# EAGLE board Laser_Array_CPU_V1.1 (EAGLE 7.7.0)
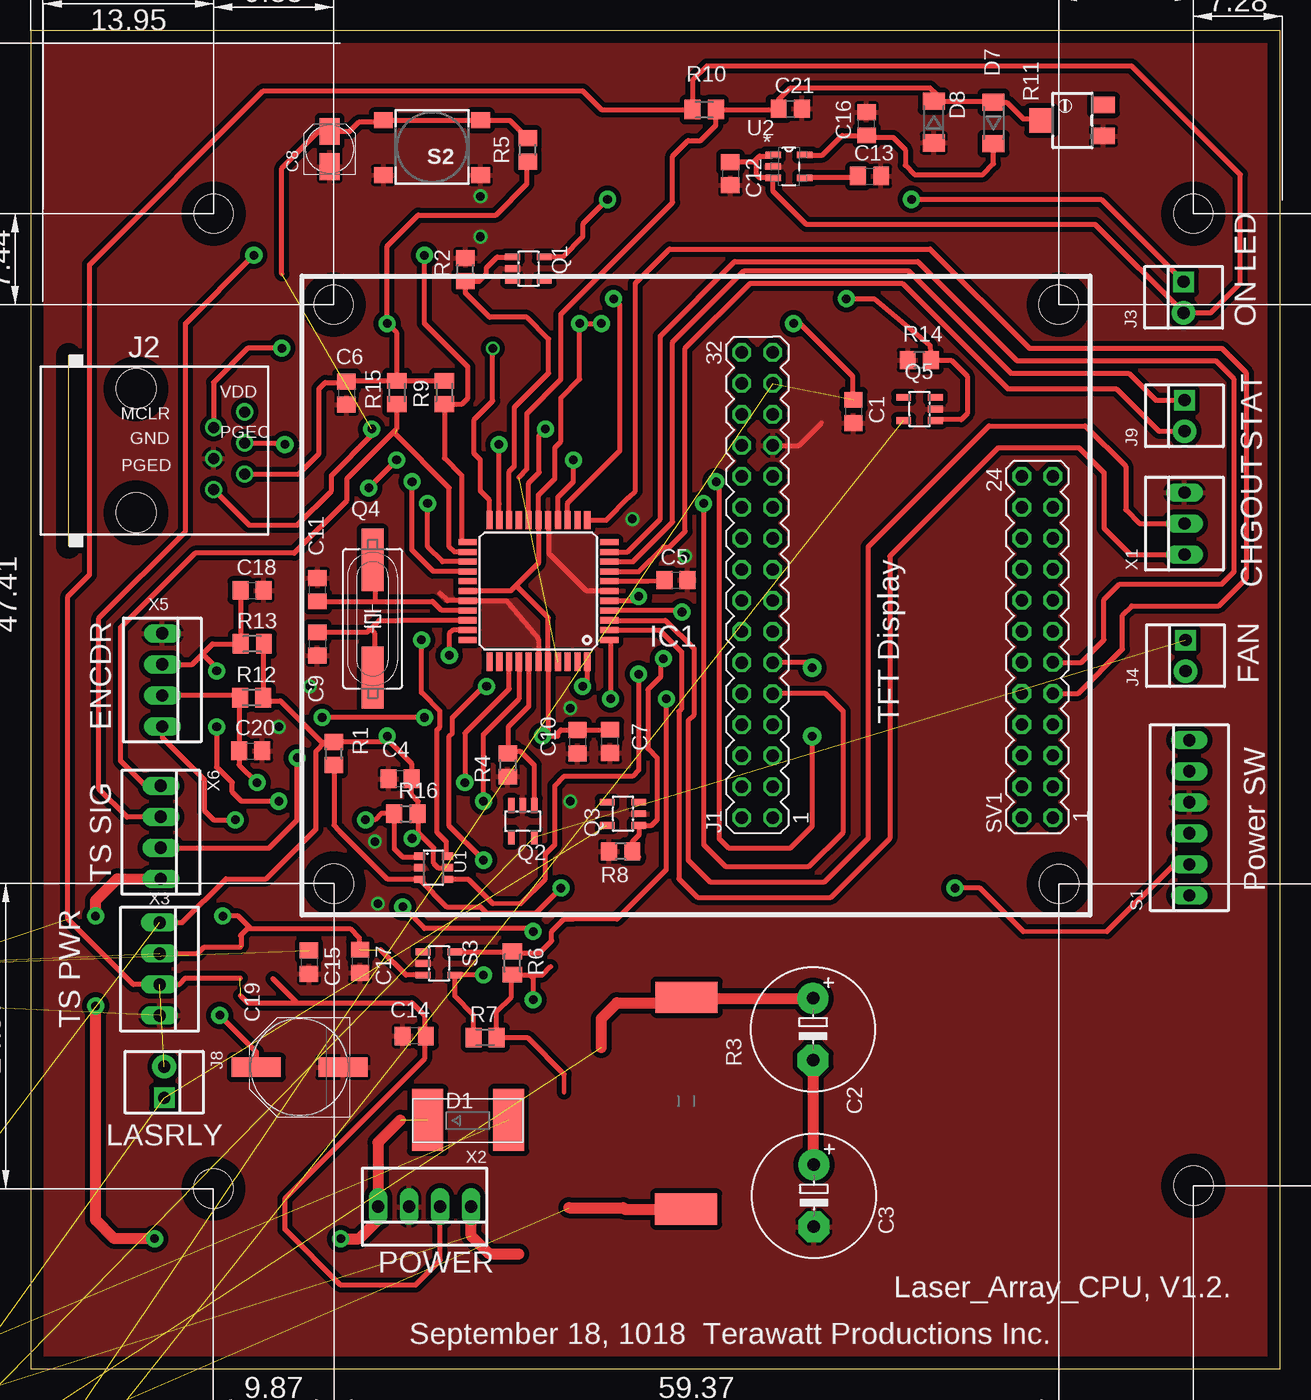
[diagram p0: board, top side]
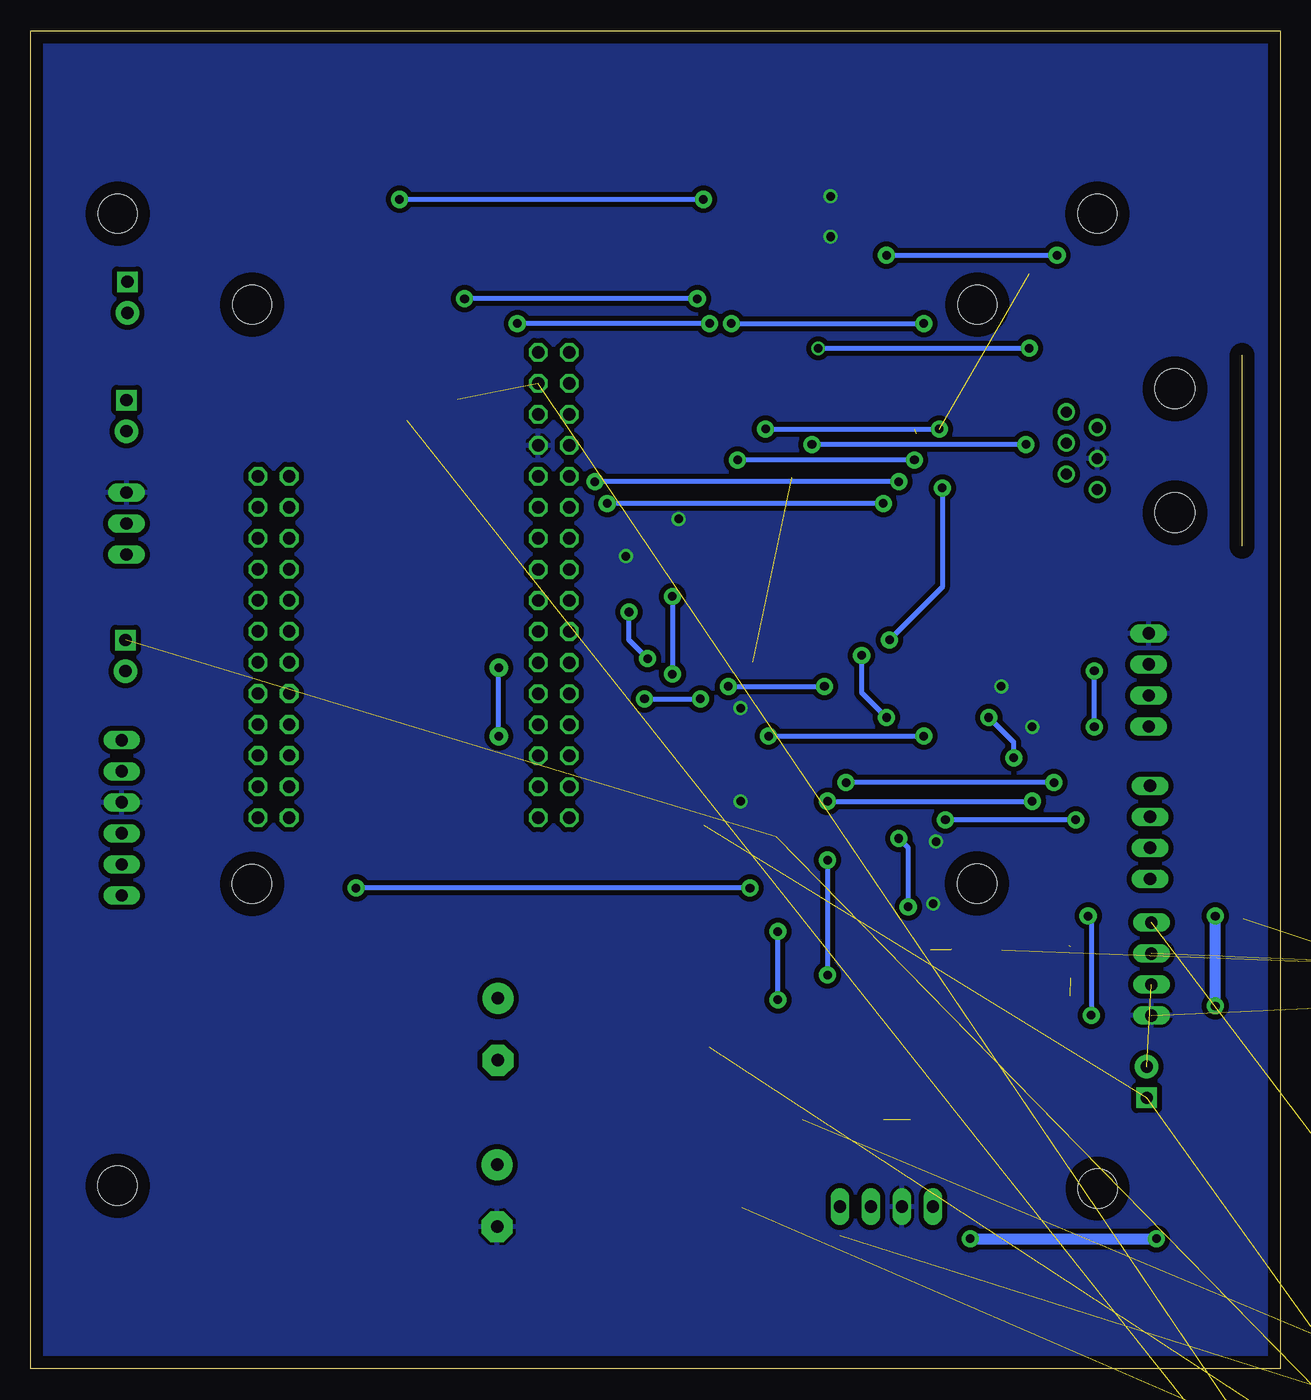
[diagram p1: board, bottom side, seen from below]

Size 102.34 x 109.59 mm. Coordinates in mm from the lower left corner, seen from the top.
Outline: 0,0 102.34,0 102.34,109.59 0,109.59 0,0
Copper layers (1*16): Top 0.035mm / dielectric 1.5mm / Bottom 0.035mm
Design rules "default *": minimum track width 10mil, minimum drill 24mil, track to track 16mil, track to pad 14mil, pad to pad 14mil, via to via 14mil, smd to smd 14mil, copper to edge 40mil, drill to drill 8mil, minimum pad ring 10mil, minimum via ring 8mil, stop-mask expansion 4mil, vias tented up to drill 0mil, thermal gap 10mil
Net classes: 0 default: width 0.254 mm, drill 0.508 mm, clearance 0.203 mm
Holes 3.2 mm at 24.82,87.15 84.19,87.15 24.84,39.74 84.21,39.72 14.97,14.77 95.22,15.01 14.99,94.59 95.21,94.6

## Footprints (pad centres in the part's own frame; a part is rotated, then mirrored left to right if it is on the bottom)
C0805 = smd 1.3 x 1.5: 1 -0.95,0; 2 0.95,0
E5-10,5 = drill 1.016 pad 2.54: + -2.54,0 | drill 1.016 pad 2.54 octagon: - 2.54,0
CAP3X3 = smd 2.2 x 1.6: + 1.45,0; - -1.425,0
PANASONIC_F = smd 4 x 1.6: + 3.55,0; - -3.55,0
S10M-TPMSCT-ND = smd 2.54 x 5.08: A 4.106,0.05; C -2.54,0.055
DO214AC = smd 1.8 x 1.7: A 2.05,0; C -2.05,0
SOD80 = smd 1.4 x 1.8: 1 -1.7,0; 2 1.7,0
TQFP44 = smd 1.5 x 0.5: 1 -5.8,4; 2 -5.8,3.2; 3 -5.8,2.4; 4 -5.8,1.6; 5 -5.8,0.8; 6 -5.8,0; 7 -5.8,-0.8; 8 -5.8,-1.6; 9 -5.8,-2.4; 10 -5.8,-3.2; 11 -5.8,-4; 23 5.8,-4; 24 5.8,-3.2; 25 5.8,-2.4; 26 5.8,-1.6; 27 5.8,-0.8; 28 5.8,0; 29 5.8,0.8; 30 5.8,1.6; 31 5.8,2.4; 32 5.8,3.2; 33 5.8,4 | smd 0.5 x 1.5: 12 -4,-5.8; 13 -3.2,-5.8; 14 -2.4,-5.8; 15 -1.6,-5.8; 16 -0.8,-5.8; 17 0,-5.8; 18 0.8,-5.8; 19 1.6,-5.8; 20 2.4,-5.8; 21 3.2,-5.8; 22 4,-5.8; 34 4,5.8; 35 3.2,5.8; 36 2.4,5.8; 37 1.6,5.8; 38 0.8,5.8; 39 0,5.8; 40 -0.8,5.8; 41 -1.6,5.8; 42 -2.4,5.8; 43 -3.2,5.8; 44 -4,5.8
MA16-2 = drill 1.016 octagon: 1 -20.32,-1.27; 2 -20.32,1.27; 3 -17.78,-1.27; 4 -17.78,1.27; 5 -15.24,-1.27; 6 -15.24,1.27; 7 -12.7,-1.27; 8 -12.7,1.27; 9 -10.16,-1.27; 10 -10.16,1.27; 11 -7.62,-1.27; 12 -7.62,1.27; 13 -5.08,-1.27; 14 -5.08,1.27; 15 -2.54,-1.27; 16 -2.54,1.27; 17 0,-1.27; 18 0,1.27; 19 2.54,-1.27; 20 2.54,1.27; 21 5.08,-1.27; 22 5.08,1.27; 23 7.62,-1.27; 24 7.62,1.27; 25 10.16,-1.27; 26 10.16,1.27; 27 12.7,-1.27; 28 12.7,1.27; 29 15.24,-1.27; 30 15.24,1.27; 31 17.78,-1.27; 32 17.78,1.27
RJ11-NO_SHIELD = drill 0.9 pad 1.4: 1 -3.175,8.89; 2 -1.905,6.35; 3 -0.635,8.89; 4 0.635,6.35; 5 1.905,8.89; 6 3.175,6.35 | hole 3.251: -5.08,0; 5.08,0
22-23-2021 = drill 1 pad 1.93: 1 -1.27,0 | drill 1 pad 1.676 square: 2 1.27,0
SOT23-5L = smd 0.55 x 1.2: 1 -0.95,-1.3; 2 0,-1.3; 3 0.95,-1.3; 4 0.95,1.3; 5 -0.95,1.3
SM49 = smd 5.08 x 1.778: 1 -4.826,0; 2 4.826,0
R0805 = smd 1.3 x 1.5: 1 -0.95,0; 2 0.95,0
RESISTOR5W = smd 2.54 x 5.08: 1 -4,-0.95; 2 13.34,-1
M0805 = smd 1.3 x 1.6: 1 -0.95,0; 2 0.95,0
RTRIM3224X = smd 1.32 x 1.9: 1 -1.27,-2.54; 3 1.27,-2.54 | smd 2 x 2: 2 0,2.54
RELAY_SPST_1A = smd 1 x 2.2: 1 1.88,-5.825; 2 6.96,-5.825; 3 6.96,2.175; 4 -0.66,2.175
22-23-2061 = drill 1 long: 1 -6.35,0; 2 -3.81,0; 3 -1.27,0; 4 1.27,0; 5 3.81,0; 6 6.35,0
PUSHBUTTON_SMD_SJ = smd 1.55 x 1.3: 1 -3.865,2.205; 2 4.085,2.205; 3 -3.865,-2.295; 4 4.085,-2.295
MA12-2 = drill 1.016 octagon: 1 -13.97,-1.27; 2 -13.97,1.27; 3 -11.43,-1.27; 4 -11.43,1.27; 5 -8.89,-1.27; 6 -8.89,1.27; 7 -6.35,-1.27; 8 -6.35,1.27; 9 -3.81,-1.27; 10 -3.81,1.27; 11 -1.27,-1.27; 12 -1.27,1.27; 13 1.27,-1.27; 14 1.27,1.27; 15 3.81,-1.27; 16 3.81,1.27; 17 6.35,-1.27; 18 6.35,1.27; 19 8.89,-1.27; 20 8.89,1.27; 21 11.43,-1.27; 22 11.43,1.27; 23 13.97,-1.27; 24 13.97,1.27
SOT23-6 = smd 0.6 x 0.9: 1 -0.95,-1.15; 2 0,-1.15; 3 0.95,-1.15; 4 0.95,1.15; 5 0,1.15; 6 -0.95,1.15
SOT95P280X145-5N = smd 1.27 x 0.559: 1 -1.295,0.94; 2 -1.295,0; 3 -1.295,-0.94; 4 1.295,-0.94; 5 1.295,0.94
22-23-2031 = drill 1 long: 1 -2.54,0; 2 0,0; 3 2.54,0
22-23-2041 = drill 1 long: 1 -3.81,0; 2 -1.27,0; 3 1.27,0; 4 3.81,0

## Placement (x,y rotation side)
C1  0.1uF  [C0805]  67.37,78.4 270 top
C2  10F  [E5-10,5]  64.08,27.82 270 top
C3  10F  [E5-10,5]  64.13,14.19 270 top
C4  0.1uF  [C0805]  30.26,48.32 180 top
C5  10uF  [C0805]  52.86,64.59 0 top
C6  0.1uF  [C0805]  25.87,79.9 270 top
C7  0.1uF  [C0805]  47.45,51.38 90 top
C8  10uF  [CAP3X3]  24.49,99.88 90 top
C9  18pF  [C0805]  23.48,59.37 270 top
C10  0.1uF  [C0805]  44.79,51.36 270 top
C11  18pF  [C0805]  23.5,63.8 90 top
C12  1uF  [C0805]  57.3,97.86 270 top
C13  10nF  [C0805]  68.7,97.67 0 top
C14  1uF  [C0805]  31.42,27.26 180 top
C15  10nF  [C0805]  22.8,33.31 270 top
C16  2.2uF  [C0805]  68.46,101.95 90 top
C17  2.2uF  [C0805]  26.99,33.38 270 top
C18  10nF  [C0805]  18.14,63.75 0 top
C19  470uF  [PANASONIC_F]  22.03,24.7 180 top
C20  10nF  [C0805]  18.03,50.61 0 top
C21  10nF  [C0805]  62.21,103.19 0 top
D1  S10M-TPMSCT_ND  [S10M-TPMSCT-ND]  35.05,20.34 0 top
D2  S10M-TPMSCT_ND  [S10M-TPMSCT-ND]  -20.07,-5.59 0 top  (outside the outline)
D3  S10M-TPMSCT_ND  [S10M-TPMSCT-ND]  -29.46,-5.59 0 top  (outside the outline)
D4  [DO214AC]  -28.19,-17.27 0 top  (outside the outline)
D5  [DO214AC]  -28.19,-21.33 0 top  (outside the outline)
D6  [DO214AC]  -28.19,-25.4 0 top  (outside the outline)
D7  LL4148FSCT-ND  [SOD80]  78.85,102.02 90 top
D8  LL4148FSCT-ND  [SOD80]  73.97,102.09 270 top
D9  [DO214AC]  -28.19,-29.46 0 top  (outside the outline)
D10  [DO214AC]  -28.19,-49.27 0 top  (outside the outline)
IC1  PIC24FJ64GA004  [TQFP44]  41.58,63.7 180 top
J1  MA16-2  [MA16-2]  59.51,65.46 90 top
J2  [RJ11-NO_SHIELD]  8.64,75.19 270 top
J3  22-23-2021  [22-23-2021]  94.41,87.75 90 top
J4  22-23-2021  [22-23-2021]  94.57,58.41 90 top
J8  22-23-2021  [22-23-2021]  10.95,23.48 270 top
J9  22-23-2021  [22-23-2021]  94.48,78.05 90 top
Q1  [SOT23-5L]  40.77,90.1 270 top
Q2  [SOT23-5L]  40.31,44.84 180 top
Q3  [SOT23-5L]  48.51,45.45 90 top
Q4  [SM49]  28.02,61.43 90 top
Q5  [SOT23-5L]  72.79,78.6 90 top
R1  10k  [R0805]  24.84,50.39 90 top
R2  100k  [R0805]  35.6,90 90 top
R3  10R, 5W  [RESISTOR5W]  54.68,26.43 270 top
R4  100k  [R0805]  39.07,49.44 270 top
R5  10k  [R0805]  40.71,99.81 90 top
R6  4.7k  [M0805]  39.46,33.23 270 top
R7  4.7k  [M0805]  37.22,27.14 0 top
R8  100k  [R0805]  48.32,42.38 180 top
R9  4.7k  [M0805]  33.88,79.96 90 top
R10  220k  [M0805]  55.16,103.12 180 top
R11  200k  [RTRIM3224X]  85.31,102.23 90 top
R12  10k  [M0805]  18.1,54.96 0 top
R13  10k  [M0805]  18.16,59.36 0 top
R14  100k  [R0805]  72.77,82.6 180 top
R15  4.7k  [M0805]  30,79.96 90 top
R16  10k  [R0805]  30.73,45.47 0 top
RLY1  RELAY_SPST_1A  [RELAY_SPST_1A]  -24.38,-36.57 0 top  (outside the outline)
S1  [22-23-2061]  94.88,45.13 90 top
S2  TACT_PB  [PUSHBUTTON_SMD_SJ]  32.97,99.95 180 top
S3  TC74  [SOT23-5L]  33.45,33.2 270 top
SV1  [MA12-2]  82.44,59.12 90 top
U1  MAX6817  [SOT23-6]  32.99,41.03 270 top
U2  LP2985-28DBVTE4  [SOT95P280X145-5N]  62.09,98.46 0 top
U4  LP2985-50DBVR  [SOT95P280X145-5N]  -17.78,31.5 90 top  (outside the outline)
X1  22-23-2031  [22-23-2031]  94.48,69.22 90 top
X2  22-23-2041  [22-23-2041]  32.27,13.29 180 top
X3  22-23-2041  [22-23-2041]  10.57,32.74 270 top
X5  22-23-2041  [22-23-2041]  10.78,56.42 270 top
X6  22-23-2041  [22-23-2041]  10.67,43.94 270 top

## Library data of the parts
C1-C7 C9-C21 R1 R2 R4-R16 = rcl
C8 D1-D6 D9 D10 J1 J2 Q1-Q3 Q5 R3 RLY1 S1-S3 U1 = Mine
D7 D8 = semicon-smd-ipc
IC1 = microchip; MPN: PIC24FJ64GA004-E/PT; OC_FARNELL: 1332299; OC_NEWARK: 98M1927
J3 J4 J8 J9 = Mine; MF: MOLEX; MPN: 22-23-2021; OC_FARNELL: 1462926; OC_NEWARK: 25C3832
Q4 = adafruit; OC_FARNELL: unknown; OC_NEWARK: unknown
SV1 = con-lstb; OC_FARNELL: unknown; OC_NEWARK: unknown
U2 = Texas Instruments_By_element14_Batch_1; MPN: LP2985-28DBVTE4; OC_FARNELL: 1053676; OC_NEWARK: 97K3681; PACKAGE: SOT-23-5; SUPPLIER: Texas Instruments
U4 = Texas Instruments_By_element14_Batch_1; MPN: LP2985-33DBVT; OC_FARNELL: -; OC_NEWARK: 43J9347; PACKAGE: SOT-23-5; SUPPLIER: Texas Instruments
X1 = Mine; MF: MOLEX; MPN: 22-23-2031; OC_FARNELL: 1462950; OC_NEWARK: 30C0862
X2 X3 X5 X6 = Mine; MF: MOLEX; MPN: 22-23-2041; OC_FARNELL: 1462920; OC_NEWARK: 38C0355

## Nets
!RESET: IC1.32 X6.3
+12V: C12.1 C14.1 D6.C D9.C J3.1 J8.1 R10.2 U2.1 U2.3 U4.1 U4.3 X2.2 X3.3
CHGA: IC1.8 J9.1
CHGB: IC1.9 J9.2
CHGOUTA: IC1.2 X1.1
CHGOUTB: IC1.3 X1.2
CS: IC1.12 SV1.9
DC: IC1.10 SV1.11
DISPWR: IC1.14 Q5.1 R14.1
ENCDR_A: C20.1 IC1.36 R12.1 X5.3
ENCDR_B: C18.1 IC1.37 R13.1 X5.2
ENSW_I: R16.1 U1.1 X5.4
ENSW_O: IC1.15 U1.6
EXFAN: IC1.38 Q2.1 R4.1
GND: C1.2 C3.- C4.2 C5.2 C6.2 C7.1 C8.- C9.2 C10.2 C11.2 C12.2 C13.2 C14.2 C15.2 C16.2 C17.2 C18.2 C19.- C20.2 C21.2 D8.2 IC1.6 IC1.16 IC1.29 IC1.39 J1.25 J2.4 Q1.2 Q2.2 Q3.2 Q5.2 R2.2 R4.2 R8.2 R11.1 R14.2 S1.4 S2.1 S2.2 S3.2 U1.2 U2.2 U4.2 X1.3 X2.3 X3.4 X5.1
LASRLY: IC1.4 Q3.1 R8.1
MOSI: IC1.25 J1.9
N$1: C8.+ IC1.18 J2.6 R5.2 S2.3 S2.4
N$2: C5.1 IC1.7
N$3: D1.A D2.C
N$4: IC1.22 J2.2
N$6: C9.1 IC1.31 Q4.1
N$7: C11.1 IC1.30 Q4.2
N$8: D10.A Q5.5 RLY1.3
N$9: R1.1 S1.2 U1.3
N$10: IC1.5 U1.4
N$11: J3.2 Q1.5
N$12: D6.A J4.2 Q2.5
N$13: D9.A J8.2 Q3.5
N$14: C1.1 J1.29 RLY1.1
N$15: C15.1 U4.4
N$16: IC1.21 J2.3
N$33: D3.C D4.A R3.2
N$36: C2.- C3.+
N$37: C2.+ D5.A R3.1
N$55: C13.1 U2.4
ONLED: IC1.20 Q1.1 R2.1
SCL1: IC1.44 R7.1 S3.4
SCL2: IC1.24 R15.1 X6.1
SCLK: IC1.26 J1.11
SDA1: IC1.1 R6.1 S3.5
SDA2: IC1.23 R9.1 X6.2
VDD: C4.1 C6.1 C7.2 C10.1 D4.C D5.C D10.C IC1.17 IC1.28 IC1.40 J2.5 R1.2 R5.1 R6.2 R7.2 R9.2 R12.2 R13.2 R15.2 R16.2 RLY1.2 RLY1.4 U1.5 X3.1
VDD_TB: D2.A D3.A X2.1
VIN1: C21.1 D7.2 D8.1 IC1.41 R10.1 R11.2
VLASER: D1.C X2.4 X6.4
VRR: C16.1 D7.1 U2.5
VTS: C17.1 C19.+ S3.3 U4.5 X3.2

## Tracks (layer width: path | path; a pad name or v marks a point on that pad's centre or on a via)
!RESET  (via drill 0.7 pad 1.4)
  Top 0.406: v21.84,50.04 21.84,44.96 19.53,42.65 19.53,42.67 X6.3 | IC1.32 34.59,60.5 34.29,60.2 v34.29,58.42 | v32.26,53.34 v23.88,53.34
  Bottom 0.406: v23.88,53.34 21.84,51.31 v21.84,50.04 | v34.29,58.42 34.29,55.37 v32.26,53.34
+12V  (6 unrouted)
  Top 0.406: 59.44,99.06 59.44,97.79 59.69,97.54 60.78,97.54 U2.3 60.8,96.43 63.5,93.73 87.16,93.73 J3.1 96.63,86.48 99.06,88.9 99.06,97.79 90.17,106.68 55.37,106.68 54.21,105.52 R10.2 46.74,103.12 45.21,104.65 19.05,104.65 4.83,90.43 4.83,65.03 3.05,63.25 3.05,36.83 8.41,31.47 X3.3 10.59,31.5 12.19,31.5 12.7,32.01 17.17,32.01 | 59.44,99.06 59.69,99.32 60.72,99.32 U2.1 | 59.44,99.06 59.19,98.81 C12.1 | 19.84,31.98 21.84,29.97 | 21.84,29.97 31.24,29.97 32.26,28.96 32.26,27.37 C14.1 32.26,27.14 32.26,25.4 20.83,13.97 20.83,11.43 25.4,6.86 31.5,6.86 33.54,8.9 X2.2 | 17.19,30.56 17.78,29.97 21.84,29.97
CHGA
  Top 0.406: IC1.8 47.4,65.28 49.78,65.28 51.82,67.31 52.32,67.31 53.59,68.58 53.59,83.57 58.93,88.9 71.37,88.9 80.01,80.27 88.9,80.27 92.38,76.78 J9.1
CHGB
  Top 0.406: IC1.9 49.33,66.1 52.58,69.34 52.58,84.08 58.42,89.92 71.88,89.92 80.26,81.54 89.92,81.54 92.13,79.32 J9.2
CHGOUTA
  Top 0.406: IC1.2 51.52,60.5 53.34,58.68 53.34,54.1 53.09,53.85 53.09,40.13 54.61,38.61 65.53,38.61 70.36,43.44 70.36,66.55 79.25,75.44 85.85,75.44 87.88,73.41 87.88,68.84 90.04,66.68 X1.1
CHGOUTB
  Top 0.406: IC1.3 51.99,61.3 54.36,58.93 54.36,53.6 53.85,53.09 53.85,41.66 55.63,39.88 65.02,39.88 68.58,43.44 68.58,67.31 78.49,77.22 86.36,77.22 89.66,73.92 89.66,70.36 90.8,69.22 X1.2
CS
  Top 0.406: IC1.12 47.15,69.5 49.02,71.38 49.53,71.88 49.53,88.9 52.32,91.7 73.66,91.7 81.79,83.57 97.54,83.57 99.57,81.54 99.57,64.77 97.28,62.49 90.17,62.49 89.41,61.72 89.41,58.93 85.79,55.31 SV1.9
DC
  Top 0.406: IC1.10 48.86,66.9 51.56,69.6 51.56,84.58 57.66,90.68 72.64,90.68 80.77,82.55 97.03,82.55 98.55,81.03 98.55,65.28 97.54,64.26 89.15,64.26 87.88,62.99 87.88,59.69 86.04,57.85 SV1.11
DISPWR  (via drill 0.7 pad 1.4)
  Top 0.406: Q5.1 74.17,77.73 76.2,77.73 76.71,78.23 76.71,81.28 75.39,82.6 R14.1 73.66,83.82 69.09,87.63 v66.8,87.63 | 43.94,69.54 IC1.14 43.98,70.91 48.26,75.19 48.26,87.12 v47.75,87.63
  Bottom 0.406: v47.75,87.63 v66.8,87.63
ENCDR_A  (via drill 0.7 pad 1.4)
  Top 0.406: X5.3 16.96,55.15 R12.1 17.08,54.89 C20.1 17.08,49.47 v18.54,48.01 | IC1.36 39.18,55.69 35.56,52.07 v35.56,48.01
  Bottom 0.406: v18.54,48.01 v35.56,48.01
ENCDR_B  (via drill 0.7 pad 1.4)
  Top 0.406: X5.2 13.24,57.69 14.1,58.55 | 14.1,58.55 14.91,59.36 R13.1 17.21,63.74 C18.1 | IC1.37 39.98,54.87 37.08,51.97 v37.08,46.48 | v20.32,46.48 17.27,46.48 16.51,47.25 16.51,48.01 15.24,49.28 v15.24,52.58 | v15.24,57.15 15.24,57.41 14.1,58.55
  Bottom 0.406: v37.08,46.48 v20.32,46.48 | v15.24,52.58 v15.24,57.15
ENSW_I  (via drill 0.7 pad 1.4)
  Top 0.406: U1.1 31.77,41.91 30.48,41.91 29.78,42.61 R16.1 28.7,45.47 28.19,44.96 v27.43,44.96 | X5.4 10.78,51.7 14.22,48.26 14.22,45.72 14.99,44.96 v16.76,44.96
  Bottom 0.406: v16.76,44.96 v27.43,44.96
ENSW_O  (via drill 0.7 pad 1.4)
  Top 0.406: v32,59.69 32,55.37 33.53,53.85 33.53,52.58 33.27,52.33 33.27,43.94 34.04,43.18 34.04,42.09 U1.6 | IC1.15 43.18,71.38 44.45,72.65 v44.45,74.42 | v27.69,72.14 v29.97,74.42
  Bottom 0.406: v29.97,74.42 v44.45,74.42 | v27.69,72.14 27.69,64.01 v32,59.69
EXFAN
  Top 0.406: IC1.38 40.78,54.25 39.12,52.58 39.12,50.44 R4.1 39.23,50.55 40.13,50.55 41.26,49.42 Q2.1
GND  (via drill 0.7, 0.7 pad 1.14)  (1 unrouted)
  Top 0.406: 47.44,63.76 IC1.6 47.33,63.76 45.47,63.76 42.42,66.8 42.42,69.46 IC1.16 | IC1.39 41.58,59.77 38.96,62.9 IC1.29 34.13,62.9 33.53,63.5 | J1.25 62.92,75.62 64.75,77.45
  other vias: 28.19,43.18 28.45,38.1 44.2,46.48 44.2,54.1 20.32,52.58 22.86,55.88 36.83,96.01 36.83,92.71 49.28,69.6 53.59,66.55
  pour Top: 0,109.59 102.61,109.59 102.61,-0.24 0,-0.24
  pour Bottom: 0,109.59 103.08,109.59 103.33,-0.5 0.25,-0.5
LASRLY  (via drill 0.7 pad 1.4)
  Top 0.406: 49.81,41.9 R8.1 49.28,43.18 49.81,43.72 Q3.1 50.85,44.5 51.31,44.96 51.31,50.04 50.55,50.8 50.55,55.63 51.56,56.64 51.56,57.91 v51.82,58.17 | v53.34,61.98 53.22,62.1 IC1.4
  Bottom 0.406: v51.82,58.17 53.34,59.69 v53.34,61.98
MOSI  (via drill 0.7 pad 1.4)
  Top 0.406: IC1.25 33.72,66.1 32.51,67.31 v32.51,70.87 | v55.12,70.87 55.12,42.93 56.9,41.15 63.75,41.15 66.55,43.94 66.55,53.85 65.1,55.3 J1.9
  Bottom 0.406: v32.51,70.87 v55.12,70.87
N$1  (via drill 0.7 pad 1.4)  (1 unrouted)
  Top 0.406: R5.2 39.23,102.24 S2.3 S2.4 28.76,102.11 26.92,102.11 26.14,101.33 C8.+ 23.6,101.33 20.57,98.3 20.57,89.66 | IC1.18 40.78,72.53 41.66,73.41 41.66,76.46 v42.16,76.96 | J2.6 17.91,69.09 21.84,69.09 24.64,71.88 24.64,73.15 27.94,76.46 v27.94,76.96
  Bottom 0.406: v42.16,76.96 v27.94,76.96
N$2
  Top 0.406: IC1.7 50.55,64.5 C5.1
N$3  (1 unrouted)
N$4  (via drill 0.7, 0.7 pad 1.4)
  Top 0.406: IC1.22 37.58,71.13 36.83,71.88 36.83,74.42 36.32,74.93 36.32,77.73 37.85,79.25 v37.85,83.57 | v20.57,83.57 17.78,83.57 14.99,80.77 J2.2
  Bottom 0.406: v37.85,83.57 v20.57,83.57
N$6
  Top 0.406: IC1.31 30.48,61.3 | 30.48,61.3 30.23,61.3 | C9.1 27.55,60.32 27.81,60.58 | 27.81,60.58 28.53,61.3 30.48,61.3 | Q4.1 28.19,56.78 28.19,60.2 27.81,60.58
N$7
  Top 0.406: C11.1 28.19,62.85 | 28.19,62.85 32.91,62.85 33.66,62.1 IC1.30 | Q4.2 28.19,66.08 28.19,62.85
N$8  (2 unrouted)
N$9  (via drill 0.7 pad 1.4)
  Top 0.356: 81.28,35.82 88.14,35.82
  Top 0.406: 25.1,44.25 25.27,44.07 | 25.27,44.07 29.21,40.13 31.79,40.13 U1.3 34.08,37.85 36.83,37.85 37.34,37.34 41.4,37.34 v43.43,39.37 | R1.1 24.84,44.5 25.27,44.07 | 81.28,35.82 77.72,39.37 v75.69,39.37 | 88.14,35.82 93.64,41.32 S1.2
  Bottom 0.406: v43.43,39.37 v75.69,39.37
N$10  (via drill 0.7 pad 1.4)
  Top 0.356: 37.85,38.1 40.13,38.1
  Top 0.406: IC1.5 49.44,62.9 v49.78,63.25 | v49.78,56.9 49.78,49.02 49.28,48.52 43.69,48.52 42.93,47.75 42.93,42.93 42.16,42.17 42.16,40.13 40.13,38.1 | U1.4 35.86,40.08 37.85,38.1
  Bottom 0.406: v49.78,63.25 v49.78,56.9
N$11  (via drill 0.7 pad 1.4)
  Top 0.406: v72.14,95.76 87.67,95.76 J3.2 | v47.24,95.76 45.21,93.73 45.21,92.71 43.55,91.05 Q1.5
  Bottom 0.406: v72.14,95.76 v47.24,95.76
N$12  (2 unrouted)
N$13  (2 unrouted)
N$14  (2 unrouted)
N$15  (1 unrouted)
N$16  (via drill 0.7 pad 1.4, 0.71 pad 1.4)
  Top 0.406: IC1.21 38.38,70.84 v38.35,75.69 | J2.3 20.7,75.82 v20.83,75.69
  Bottom 0.406: v20.83,75.69 v38.35,75.69
N$33  (2 unrouted)
  Top 0.356: 48.51,13.21 48.63,13.09
  Top 0.889: 44.08,13.21 48.51,13.21 | 48.63,13.09 R3.2
N$36
  Top 0.356: 64.08,16.78 C3.+
  Top 0.889: C2.- 64.08,16.78
N$37  (1 unrouted)
  Top 0.356: 53.09,29.97 53.54,30.43 R3.1 53.8,30.36
  Top 0.889: 46.74,26.32 46.74,28.7 48.01,29.97 53.09,29.97 | 53.8,30.36 C2.+
N$55
  Top 0.406: C13.1 67.6,97.52 U2.4
ONLED
  Top 0.406: IC1.20 39.18,73.47 39.62,73.92 39.62,78.74 42.42,81.54 42.42,84.33 40.64,86.11 37.59,86.11 35.6,88.1 R2.1 36.73,89.05 37.34,89.66 37.34,90.17 38.21,91.05 Q1.1
SCL1  (via drill 0.7 pad 1.4)
  Top 0.406: R7.1 36.27,29.01 34.75,30.53 S3.4 34.76,32.26 v37.08,32.26 | IC1.44 45.58,56.25 v45.21,55.88 | v37.08,41.66 34.29,44.45 34.29,51.82 34.54,52.07 34.54,53.34 37.08,55.88 v37.34,55.88
  Bottom 0.406: v45.21,55.88 v37.34,55.88 | v37.08,41.66 v37.08,32.26
SCL2  (1 unrouted)
  Top 0.406: R15.1 29.97,78.98 29.97,76.96 25.91,72.9 25.91,71.12 21.59,66.8 13.46,66.8 7.37,60.71 7.37,49.79 9.43,47.73 10.67,47.73 X6.1 | 29.84,76.58 34.29,72.14 34.29,67.31 34.7,66.9 IC1.24
SCLK  (via drill 0.7 pad 1.4, 0.7 pad 1.52)
  Top 0.406: v31.24,72.65 31.24,67.06 33,65.3 IC1.26 | v56.13,72.65 56.39,72.39 56.39,43.44 57.15,42.67 62.23,42.67 64.01,44.45 v64.01,51.82 | v64.01,57.41 63.58,57.84 J1.11
  Bottom 0.406: v31.24,72.65 v56.13,72.65 | v64.01,51.82 v64.01,57.41
SDA1  (via drill 0.7 pad 1.4)
  Top 0.356: 44.45,36.83 48.01,36.83
  Top 0.406: IC1.1 47.5,59.58 v47.5,54.87 | S3.5 39.43,34.15 R6.1 39.61,34.04 41.66,34.04 42.67,35.05 42.67,35.82 43.69,36.83 44.45,36.83 | 48.01,36.83 52.07,40.9 v52.07,54.87
  Bottom 0.406: v52.07,54.87 v47.5,54.87
SDA2  (via drill 0.7 pad 1.4)
  Top 0.406: IC1.23 35.43,67.7 35.31,67.82 35.31,73.15 33.88,74.58 R9.1 35.32,79.01 35.81,79.5 35.81,82.04 32.26,85.6 v32.26,91.19 | X6.2 7.9,45.21 7.9,45.19 5.59,47.5 5.59,61.47 12.7,68.58 12.7,85.6 v18.29,91.19
  Bottom 0.406: v32.26,91.19 v18.29,91.19
VDD  (via drill 0.7 pad 1.4)  (5 unrouted)
  Top 0.356: 43.69,24.13 43.69,22.66
  Top 0.406: R13.2 19.05,59.31 R12.2 19.3,54.71 20.48,54.71 23.85,51.34 24.13,51.34 | v62.48,85.6 62.99,85.6 67.31,81.28 67.31,79.41 | R9.2 33.78,80.75 | R15.2 26.18,80.91 25.93,80.65 C6.1 25.8,80.77 24.13,80.77 23.62,80.27 23.62,74.93 21.97,73.28 J2.5 | R15.2 R9.2 | 33.78,81.01 R9.2 | R15.2 30,84.81 v29.21,85.6 29.21,91.95 31.75,94.49 38.1,94.49 40.64,97.03 40.64,98.79 R5.1 | v46.74,85.6 v44.96,85.6 44.96,81.03 43.43,79.5 43.43,75.95 42.93,75.44 42.93,72.9 41.58,71.56 IC1.17 41.58,65.97 39.75,64.14 | 39.75,64.14 39.31,63.7 IC1.28 | 39.75,64.14 42.38,61.51 IC1.40 42.38,52.29 v41.91,51.82 43.18,51.82 43.18,52.07 43.43,52.33 44.77,52.33 C10.1 45.07,52.33 C7.2 | R6.2 39.37,32.19 39.37,30.48 38.17,29.28 R7.2 40.68,27.14 43.69,24.13 | R6.2 41.93,32.28 42.59,32.94 | U1.5 33.39,41.03 33.02,41.4 33.02,42.67 31.75,43.94 | R6.2 39.49,32.26 40.89,32.26 41.15,32.01 v41.15,30.23 | v41.15,35.82 40.89,36.07 32.26,36.07 v30.48,37.85 | 24.13,51.34 R1.2 | 25.07,51.56 R1.2 | 24.13,51.34 23.37,50.58 23.37,44.2 19.3,40.13 16,40.13 12.42,36.55 X3.1 | R16.2 31.75,44.96 | R1.2 28.73,51.34 v29.21,51.82 29.21,51.56 31.24,49.53 31.24,48.35 C4.1 31.21,47.02 31.75,46.48 31.75,45.53 R16.2 | R16.2 31.75,45.4 31.75,43.94 | 31.75,43.94 v31.24,43.44
  Bottom 0.406: v44.96,85.6 v29.21,85.6 | v46.74,85.6 v62.48,85.6 | v41.15,30.23 v41.15,35.82 | v30.48,37.85 30.48,42.67 v31.24,43.44 | v41.91,51.82 v29.21,51.82
VDD_TB  (2 unrouted)
  Top 0.889: 39.97,9.4 37.59,9.4 36.08,10.92 X2.1
VIN1  (1 unrouted)
  Top 0.406: R11.2 82.63,102.36 81.28,102.36 79.93,103.72 D7.2 78.79,103.79 D8.1 74.17,103.99 74.17,104.4 73.66,104.9 62.23,104.9 61.26,103.93 C21.1 61.18,103.12 R10.1 56.11,101.83 54.86,100.59 53.85,100.59 52.58,99.32 52.58,95.51 43.43,86.36 43.43,81.03 40.64,78.23 40.64,73.66 39.98,73
VLASER  (via drill 0.7 pad 1.4)  (1 unrouted)
  Top 0.813: 28.45,18.54 28.46,18.54
  Top 0.889: 30.3,20.39 28.45,18.54 | v5.33,29.72 5.33,12.19 6.86,10.67 v10.16,10.67 | v5.33,37.09 5.33,38.36 7.11,40.13 X6.4 | 28.46,18.54 X2.4 28.46,12.2 26.92,10.67 v25.4,10.67
  Bottom 0.889: v25.4,10.67 v10.16,10.67 | v5.33,29.72 v5.33,37.09
VRR
  Top 0.406: U2.5 64.85,99.4 66.45,101 C16.1 68.61,100.84 70.61,100.84 71.63,99.82 71.63,98.55 72.39,97.79 77.98,97.79 78.85,98.67 D7.1
VTS  (via drill 0.7 pad 1.4)  (4 unrouted)
  Top 0.406: S3.3 30.74,32.25 28.66,34.33 | 17.17,34.55 15.75,34.55 15.24,34.55 14.22,34.55 13.69,34.01 X3.2 | 17.19,35.48 17.27,35.56 | 18.03,36.07 26.16,36.07 26.92,35.31 26.92,34.39 | 17.27,34.65 17.27,35.56 | 17.27,35.56 17.78,36.07 18.03,36.07 | 18.03,36.07 17.02,37.09 v15.75,37.09 | v15.49,28.96 18.48,25.97 C19.+
  Bottom 0.406: v15.75,37.09 15.49,36.83 v15.49,28.96

## Text on the board
tPlace: ON LED | VDD | MCLR | GND | PGEC | STAT | PGED | CHGOUT | FAN | TFT Display | ENCDR | TS SIG | Power SW | TS PWR | LASRLY | POWER | Laser_Array_CPU, V1.2. | September 18, 1018 Terawatt Productions Inc.